# Altium PCB Equipment.PcbDoc
Units mil, origin at the board's own origin, x right, y up, seen from the top; angles counter-clockwise.
Board outline 3543.31 x 4133.86 mil, 2 copper layers (Top Layer, Bottom Layer); 120 components, 103 nets, 464 pads, 349 vias.
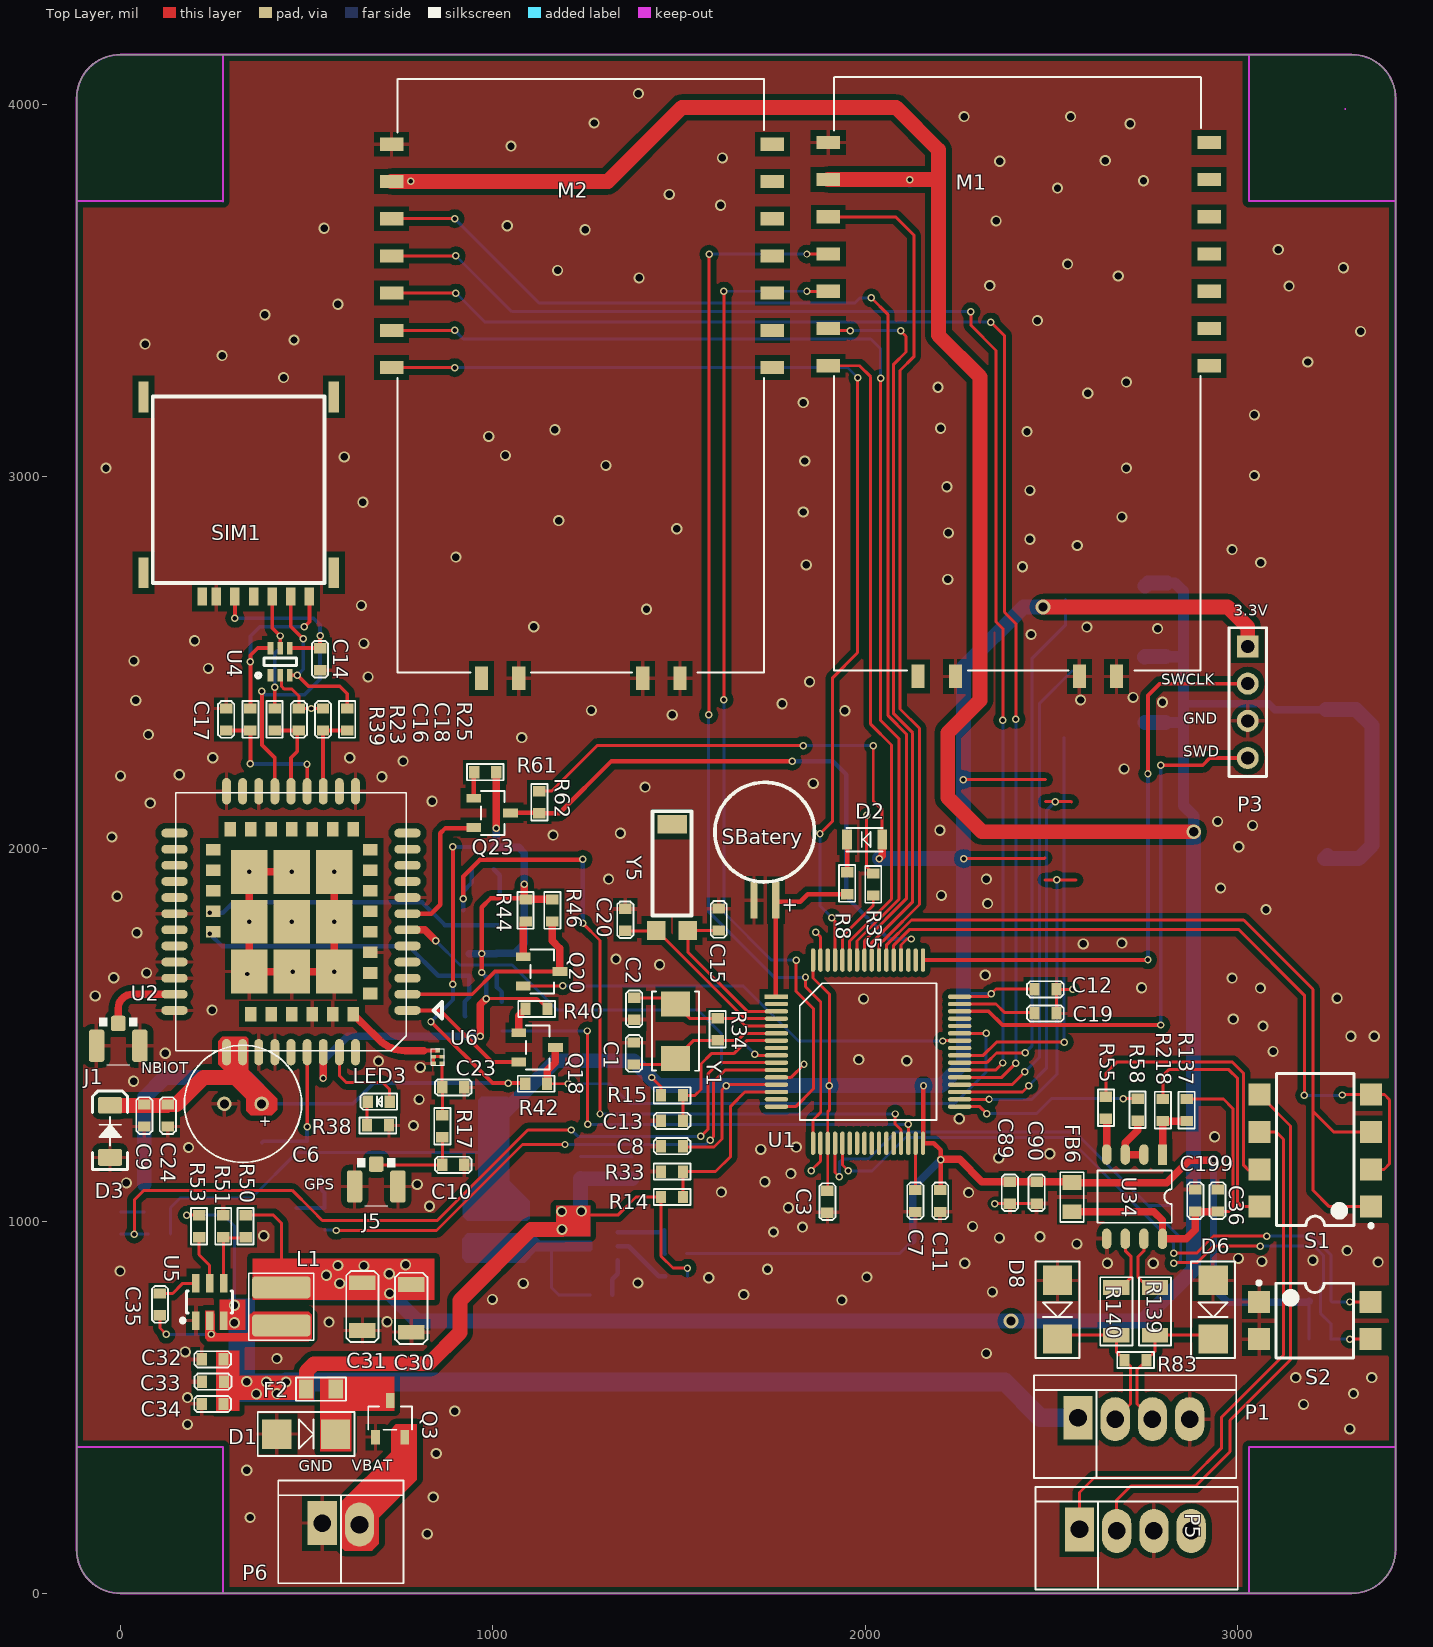
[diagram p0: Top Layer view]
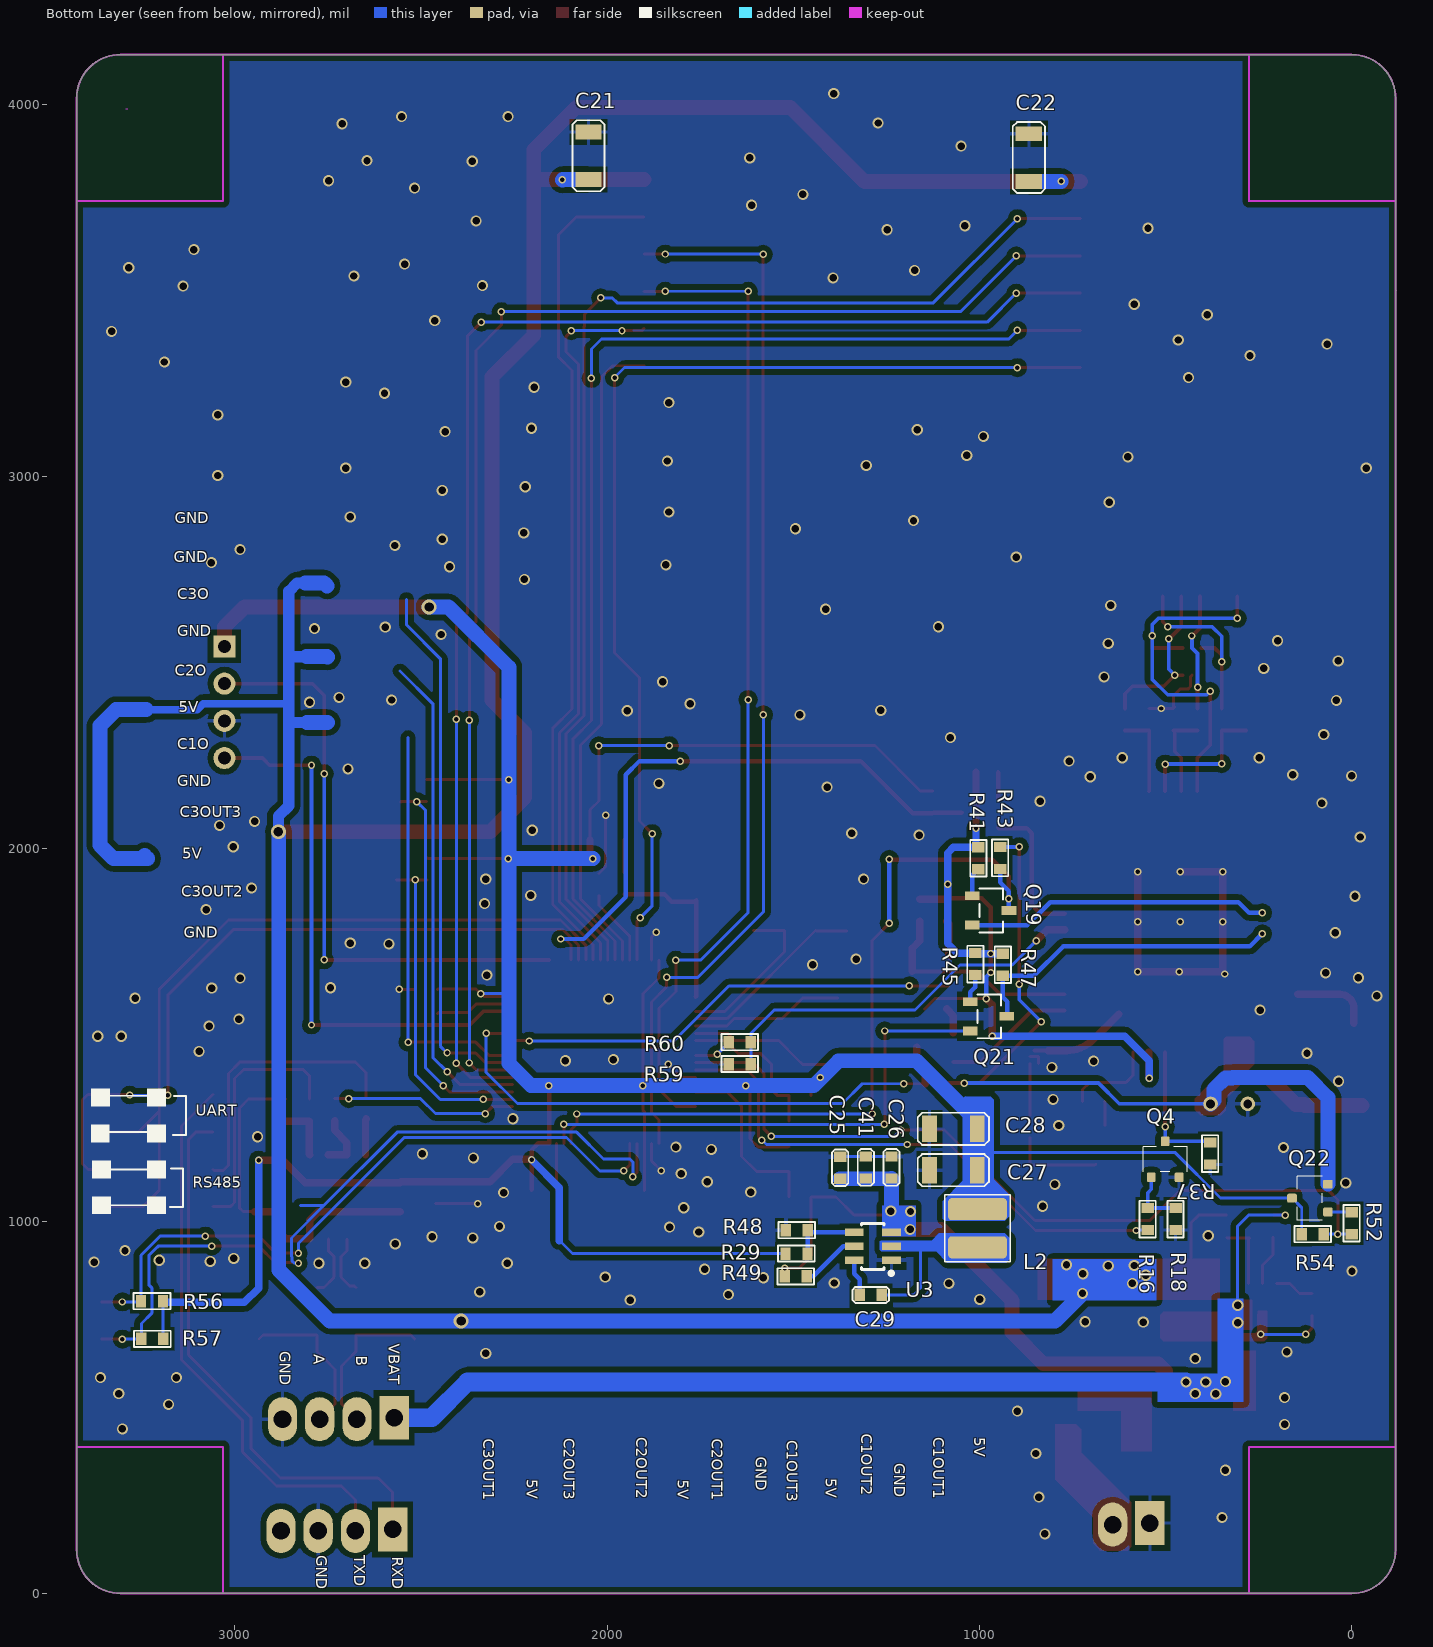
[diagram p1: Bottom Layer view, seen from below]

## Layer stack, top to bottom
Top Layer: signal copper 1.4
Dielectric: dielectric 12.6, FR-4, Dk 4.8
Bottom Layer: signal copper 1.4

## Board outline
-118.11,118.11 ccw(c0,118.11) 0,0 3307.09,0 ccw(c3307.09,118.11) 3425.2,118.11 3425.2,4015.75 ccw(c3307.09,4015.75) 3307.09,4133.86 0,4133.86 ccw(c0,4015.75) -118.11,4015.75

## Design rules (kind name [scope] priority, off if disabled: settings)
Clearance rf [InNetClass('rf')] p1: gap=25
Clearance gnd [InPolygon  And InNet(AGND)] p2: gap=15
Clearance [All] p3: gap=5
DiffPairsRouting [All] p1: maxlimit=10 minlimit=10 mostfreqgap=10 maxuncoupledlength=500
MinimumSolderMaskSliver [All] p1: minsoldermaskwidth=2
PolygonConnect PolygonConnect_1 [IsVia And InNet(AGND)] p1: connectstyle=Direct reliefconductorwidth=10 reliefentries=4 polygonreliefangle="90 Angle"
PolygonConnect [All] p2: connectstyle=Relief reliefconductorwidth=10 reliefentries=4 polygonreliefangle="90 Angle"
RoutingVias [All] p1: holewidth=28 width=50 viastyle="Through Hole" minholewidth=28 minwidth=50 maxholewidth=28 maxwidth=50
SilkscreenOverComponentPads [All] p1: minsilkscreentomaskgap=1
SolderMaskExpansion [All] p1: expansion=4
Width [All] p1: maxlimit=200 minlimit=6 preferedwidth=10
25 further rules are at their usual default settings.

## Classes and differential pairs
component class rs485: C36 C89 C90 C199 D6 D8 FB6 P1 P5 R55 R58 R83 R137 R139 R140 R218 S1 U34
component class POWER: C25 C26 C27 C28 C29 C30 C31 C32 C33 C34 C35 C41 D1 F2 L1 L2 P6 Q3 Q22 R29 R48 R49 R50 R51 R52 R53 R54 U3 U5
component class nbiot&gps: C6 C9 C10 C14 C16 C17 C18 C23 C24 D3 J1 J5 LED3 Q4 Q18 Q19 Q20 Q21 R16 R17 R18 R23 R25 R37 R38 R39 R40 R41 R42 R43 R44 R45 R46 R47 SIM1 U2 U4 U6
component class LORA: C21 C22 M1 M2
component class CPU: C1 C2 C3 C7 C8 C11 C12 C13 C15 C19 C20 D2 P3 Q23 R8 R14 R15 R33 R34 R35 R59 R60 R61 R62 SBatery U1 Y1 Y5
component class CONNECTOR: R56 R57 S2
differential pair 4852: +4852_P -4852_N
differential pair 485: +485_P -485_N

## Components (designator, comment, footprint, x,y, rotation, side; value= is the part's Value field where it differs from the comment)
C1 "22pF" 0603c 1379,1480 r270 top
C2 "22pF" 0603c 1380,1541 r90 top
C3 "0.1uF" 0603c 1899,1023 r90 top
C6 "1000uF/6.3V/8*12" 8*12 328.98,1315.19 r0 top
C7 "2.2uF" 0603c 2135,1025 r90 top
C8 "0.1uF" 0603c 1451.94,1201.5 r0 top
C9 "33pF" 0603C 126.98,1254.19 r90 top
C10 "NC" 0603C 864.32,1151.39 r0 top
C11 "0.1uF" 0603c 2202,1025 r90 top
C12 "0.1uF" 0603c 2514,1623 r180 top
C13 "0.1uF" 0603c 1451.94,1269.75 r0 top
C14 "0.1uF" 0603C 536,2480 r90 top
C15 "10pF" 0603c 1607,1840 r270 top
C16 "10pF/NC" 0603C 478.98,2377.19 r270 top
C17 "10pF/NC" 0603C 283.98,2377.19 r270 top
C18 "10pF/NC" 0603C 543.98,2377.19 r270 top
C19 "2.2uF" 0603c 2514,1558 r180 top
C20 "10pF" 0603c 1356,1839 r270 top
C21 "22uF/10V" 1206C 2050,3798 r90 bottom
C22 "22uF/10V" 1206C 867,3793 r90 bottom
C23 "NC" 0603C 864.32,1359.39 r0 top
C24 "10pF" 0603C 63.98,1254.19 r90 top
C25 "0.1uF/25V" 0603C 1374,1173.06 r270 bottom
C26 "0.1uF/25V" 0603C 1236,1174.06 r270 bottom
C27 "22uF/10V" 1206C 1006,1137 r0 bottom
C28 "22uF/10V" 1206C 1006,1248 r0 bottom
C29 "0.1uF" 0603C 1262,802 r0 bottom
C30 "22uF/10V" 1206C 781,830 r270 top
C31 "22uF/10V" 1206C 649.85,834.47 r270 top
C32 "10uF/25V" 0603C 217.94,629 r0 top
C33 "0.1uF/25V" 0603C 218.94,569 r0 top
C34 "0.1uF/25V" 0603C 217.94,509 r0 top
C35 "0.1uF" 0603C 106,747 r90 top
C36 "10uF/25V" 0603C 2947,1085 r270 top
C41 "10uF/25V" 0603C 1305,1174.06 r270 bottom
C89 "10uF/25V" 0603C 2389,1047 r90 top
C90 "0.01uF" 0603C 2461,1047 r90 top
C199 "0.01uF" 0603C 2887,1085 r270 top
D1 "SMAJ12CA" SMA 420,428 r0 top
D2 "RB751V40T1" SOD323 2046,2025 r180 top
D3 "DIODE_SCHOTTKY_0" LL-34(D1206) -28.02,1241.19 r90 top
D6 "SMAJ6.5CA" SMA 2935,841 r270 top
D8 "SMAJ6.5CA" SMA 2517,841 r270 top
F2 "SMD0805P300" 0805R 578,549 r180 top
FB6 "JWWBW2012 M600HT" 0805CZ 2556,1025 r90 top
J1 "IPEX" RF-UFL -6.02,1471.19 r180 top
J5 "IPEX" RF-UFL 686.98,1093.19 r180 top
L1 "SRP4020TA-3R3M" CD_4*4 432,771 r0 top
L2 "SRP4020TA-3R3M" CD_4*4 1005,981 r180 bottom
LED3 "LED" 0603LED 722.98,1321.19 r180 top
M1 "E22-400T30S" E22-400T30S 1917,2479 r0 top
M2 "E22-400T30S" E22-400T30S 744,2474 r0 top
P1 "Header 4" 4X2.54MMZ 2572,472 r0 top
P3 "Header 4" HDR1X4 3028,2544 r270 top
P5 "Header 4" 4X2.54MMZ 2576,172 r0 top
P6 "Header 2" 2X2.54MMZ 542,189 r0 top
Q3 "Si2369DS" sot23-3 685,420 r270 top
Q4 "S8050" SOT23 500.98,1166.19 r180 bottom
Q18 "MMBT3904" SOT23-3 1069.98,1506.19 r180 top
Q19 "MMBT3904" SOT23-3 1018.98,1874.19 r0 bottom
Q20 "MMBT3904" SOT23-3 1081.98,1710.19 r180 top
Q21 "MMBT3904" SOT23-3 1024.53,1589.69 r0 bottom
Q22 "SI2342DS" SOT23 112,1062 r90 bottom
Q23 "MMBT3904" SOT23-3 949,2136 r180 top
R8 "1K" 0603R 1952,1937 r270 top
R14 "33K/1%" 0603R 1451.94,1065 r0 top
R15 "10K" 0603R 1451.94,1338 r0 top
R16 "4.7K" 0603R 547.98,1035.19 r270 bottom
R17 "0" 0603R 864.32,1284.39 r270 top
R18 "47K" 0603R 472.98,1035.19 r270 bottom
R23 "10R" 0603R 413.98,2318.13 r90 top
R25 "10R" 0603R 608.98,2318.13 r90 top
R29 "33.2K/1%" 0603R 1521,913 r180 bottom
R33 "5.1K/1%" 0603R 1511,1133.25 r180 top
R34 "1MR" 0603R 1604,1545 r270 top
R35 "100K" 0603R 2022,1875 r90 top
R37 "1K" 0603R 379.98,1211.19 r270 bottom
R38 "1K" 0603R 661.98,1257.19 r0 top
R39 "10R" 0603R 348.98,2318.13 r90 top
R40 "4.7K" 0603R 1087.98,1570.19 r0 top
R41 "4.7K" 0603R 1002.98,1945.19 r90 bottom
R42 "10K" 0603R 1145.98,1369.19 r180 top
R43 "10K" 0603R 943.98,1946.19 r90 bottom
R44 "4.7K" 0603R 1087.98,1805.19 r90 top
R45 "4.7K" 0603R 1010.98,1661.19 r90 bottom
R46 "4.7K" 0603R 1159.98,1805.19 r90 top
R47 "4.7K" 0603R 936.98,1659.19 r90 bottom
R48 "10K/1%" 0603R 1520,976 r180 bottom
R49 "10K/1%" 0603R 1523,852 r180 bottom
R50 "54.9K/1%" 0603R 336,1016 r270 top
R51 "10K/1%" 0603R 276,1016 r270 top
R52 "10k" 0603R 0,965 r90 bottom
R53 "10K/1%" 0603R 211,957 r90 top
R54 "10k" 0603R 75,965 r0 bottom
R55 "1K" 0603R 2647,1275 r90 top
R56 "10k" 0603R 3252,785 r180 bottom
R57 "10k" 0603R 3251,684 r180 bottom
R58 "1K" 0603R 2732,1270 r90 top
R59 "4.7K" 0603R 1673,1422 r180 bottom
R60 "4.7K" 0603R 1614,1481 r0 bottom
R61 "4.7K" 0603R 950,2206 r0 top
R62 "4.7K" 0603R 1125,2096 r90 top
R83 "100" 0603R 2697,627 r0 top
R137 "100k" 0603R 2864,1269 r90 top
R139 "10" 1206R 2779,694 r90 top
R140 "10" 1206R 2675,694 r90 top
R218 "1K" 0603R 2800,1269 r90 top
S1 "SW DIP-4" SW_SMT_8 3209,1089 r180 top
S2 "SW DIP-2" SW_SMT_4 3208,733 r0 top
SBatery "SBatery" MS621FE 1731,1862 r270 top
SIM1 "microsim" "Nano SIM" 220,2678 r180 top
U1 "STM32F405RGT6" LQFP-64 1762,1603 r0 top
U2 "SIM7080G" SIM868 770.98,1566.19 r180 top
U3 "TPS562201" SOT-23-6 1236,895 r0 bottom
U4 "SMF05C_1" SC70-6L 428.98,2503.19 r90 top
U5 "TPS562201" SOT-23-6 202,733 r90 top
U6 "SAFFB1G56KB0F0A" SAFFB1G56KB0F0A 852.32,1458.73 r270 top
U34 "THVD1500" so-8 2799,1179 r270 top
Y1 "8MHz" CRAY_5032 1491,1583 r270 top
Y5 "32.768K" 32.768K 1524,1781 r180 top

## Footprints (in the part's own frame and the unit in brackets; to place one, negate y for a bottom-side part, rotate by r counter-clockwise, add the part's x,y. Pads: shape width x height; smd on the part's side, far side on the other; paste and mask are expansions set on the pad)
2X2.54MMZ [mm]
  rect 2x3 hole 1.2: 1(0,0)
  oval 2x3 hole 1.2: 2(2.54,-0.1)
  silkscreen extent -3,-4.1 5.54,2.9
4X2.54MMZ [mm]
  rect 2x3 hole 1.2: 1(0,0)
  oval 2x3 hole 1.2: 2(2.54,-0.1) 3(5.08,-0.1) 4(7.62,-0.1)
  silkscreen extent -3,-4.1 10.79,2.9
8*12 [mm]
  round 1 hole 0.6: 1(1.27,0) 2(-1.27,0)
  silkscreen extent -4,-4 4,4
32.768K [mil]
  rect 50x50 smd: 1(0,0) 2(85,0)
  rect 78.74x50 smd: 3(42.13,-285)
  silkscreen extent -10,-320 95,-40
0603c [mm]
  rect 0.7x0.85 smd: 1(0,0) 2(1.5,0)
  silkscreen extent -0.5,-0.55 2,0.55
0603C [mm]
  rect 0.7x0.85 smd: 1(0,0) 2(1.5,0)
  silkscreen extent -0.5,-0.55 2,0.55
0603LED [mm]
  rect 0.7x0.85 smd: 1(0,0) 2(1.5,0)
  silkscreen extent -0.5,-0.55 2,0.55
0603R [mm]
  rect 0.7x0.85 smd: 1(0,0) 2(1.5,0)
  silkscreen extent -0.5,-0.55 2,0.55
0805CZ [mm]
  rect 1x1.3 smd: 1(0,0) 2(2,0)
  silkscreen extent -0.7,-0.8 2.7,0.8
0805R [mm]
  rect 1x1.3 smd: 1(0,0) 2(2,0)
  silkscreen extent -0.7,-0.8 2.7,0.8
1206C [mm]
  rect 1x1.8 smd: 1(0,0) 2(3.25,0)
  silkscreen extent -0.8,-1.1 4.05,1.1
1206R [mm]
  rect 1x1.8 smd: 1(0,0) 2(3.25,0)
  silkscreen extent -0.7,-1.1 3.95,1.1
CD_4*4 [mm]
  rrect30% 4x1.5 smd: 1(0,-1.3) 2(0,1.3)
  silkscreen extent -2.23,-2.3 2.22,2.28, body extent -2,-2 2,2, height 1
CRAY_5032 [mm]
  rect 1.7x2 smd: 1(0,0) 2(3.7,0)
  silkscreen extent -0.86,-1.6 4.55,1.6
E22-400T30S [mm]
  rect 1.6x0.9 smd: 1(-0.4,20.8) 2(-0.4,23.34) 3(-0.4,25.88) 4(-0.4,28.42) 5(-0.4,30.96) 6(-0.4,33.5) 7(-0.4,36.04) 8(25.578,36.04) 9(25.578,33.5) 10(25.578,30.96) 11(25.578,28.42) 12(25.578,25.88) 13(25.578,23.34) 14(25.578,20.8)
  rect 0.9x1.6 smd: 15(19.27,-0.4) 16(16.73,-0.4) 17(8.27,-0.4) 18(5.73,-0.4)
  silkscreen extent 0,0 25.02,40.5
HDR1X4 [mm] "Connector; Header; 4 Position"
  rect 1.5x1.5 hole 0.9: 1(0,0)
  round 1.5 hole 0.9: 2(2.54,0) 3(5.08,0) 4(7.62,0)
  silkscreen extent -1.27,-1.27 8.89,1.27
LL-34(D1206) [mil]
  rrect25% 45x65 smd: 1(-70,0) 2(70,0)
  silkscreen extent -102,-47 108,47, body extent -70,-28 68,30, height 56
LQFP-64 [mm]
  rect 1.6x0.3 smd: 1(0,0)
  oval 1.6x0.3 smd: 2(0,-0.5) 3(0,-1) 4(0,-1.5) 5(0,-2) 6(0,-2.5) 7(0,-3) 8(0,-3.5) 9(0,-4) 10(0,-4.5) 11(0,-5) 12(0,-5.5) 13(0,-6) 14(0,-6.5) 15(0,-7) 16(0,-7.5) 33(12.5,-7.5) 34(12.5,-7) 35(12.5,-6.5) 36(12.5,-6) 37(12.5,-5.5) 38(12.5,-5) 39(12.5,-4.5) 40(12.5,-4) 41(12.5,-3.5) 42(12.5,-3) 43(12.5,-2.5) 44(12.5,-2) 45(12.5,-1.5) 46(12.5,-1) 47(12.5,-0.5) 48(12.5,0)
  oval 0.3x1.6 smd: 17(2.5,-10) 18(3,-10) 19(3.5,-10) 20(4,-10) 21(4.5,-10) 22(5,-10) 23(5.5,-10) 24(6,-10) 25(6.5,-10) 26(7,-10) 27(7.5,-10) 28(8,-10) 29(8.5,-10) 30(9,-10) 31(9.5,-10) 32(10,-10) 49(10,2.5) 50(9.5,2.5) 51(9,2.5) 52(8.5,2.5) 53(8,2.5) 54(7.5,2.5) 55(7,2.5) 56(6.5,2.5) 57(6,2.5) 58(5.5,2.5) 59(5,2.5) 60(4.5,2.5) 61(4,2.5) 62(3.5,2.5) 63(3,2.5) 64(2.5,2.5)
  silkscreen extent 1.59,-8.41 10.91,0.91
MS621FE [mm]
  rect 2.5x0.5 smd: 1(0,-0.749) 2(0,0.749)
  silkscreen extent -8.05,-3.41 -1.25,3.39
"Nano SIM" [mm]
  rect 0.7x2.1 smd: 0(-8.97,-1.615) 0(-8.97,-13.615) 0(4.02,-1.615) 0(4.02,-13.615)
  rect 0.65x1.23 smd: 1(-2.22,0) 2(-4.76,0) 3(-7.3,0) 5(-0.95,0) 6(-3.49,0) 7(-6.03,0) 8(0,0)
  silkscreen extent -8.33,-13.64 3.38,-0.91
RF-UFL [mm]
  rrect30% 1x1.05 smd: 1(0,-1.525)
  rrect30% 1.05x2.2 smd: 2(-1.475,0) 2(1.475,0)
  silkscreen extent -1.3,-1.93 1.3,1.3, body extent -1.7,-1.55 1.7,1.55, height 1.25
SAFFB1G56KB0F0A [mm]
  rect 0.3x0.3 smd: 1(0,0)
  rect 0.25x0.35 smd: 2(0.425,-0.288) 5(0.425,0.288)
  rect 0.3x0.35 smd: 3(0.9,-0.288) 4(0.9,0.288)
  silkscreen extent -0.1,-0.44 1,0.46
SC70-6L [mm]
  rect 0.85x0.4 smd: 1(-0.925,0.65) 2(-0.925,0) 3(-0.925,-0.65) 4(0.925,-0.65) 5(0.925,0) 6(0.925,0.65)
  silkscreen extent -1.09,-1.1 0.25,1.65
SIM868 [mm]
  oval 1.8x0.6 smd: 1(0,0) 2(0,-1.1) 3(0,-2.2) 4(0,-3.3) 5(0,-4.4) 6(0,-5.5) 7(0,-6.6) 8(0,-7.7) 9(0,-8.8) 10(0,-9.9) 11(0,-11) 12(0,-12.1) 22(15.9,-12.1) 23(15.9,-11) 24(15.9,-9.9) 25(15.9,-8.8) 26(15.9,-7.7) 27(15.9,-6.6) 28(15.9,-5.5) 29(15.9,-4.4) 30(15.9,-3.3) 31(15.9,-2.2) 32(15.9,-1.1) 33(15.9,0)
  oval 0.6x1.8 smd: 13(3.55,-14.95) 14(4.65,-14.95) 15(5.75,-14.95) 16(6.85,-14.95) 17(7.95,-14.95) 18(9.05,-14.95) 19(10.15,-14.95) 20(11.25,-14.95) 21(12.35,-14.95) 34(12.35,2.85) 35(11.25,2.85) 36(10.15,2.85) 37(9.05,2.85) 38(7.95,2.85) 39(6.85,2.85) 40(5.75,2.85) 41(4.65,2.85) 42(3.55,2.85)
  rect 1x0.8 smd: 43(2.549,-1.159) 44(2.549,-2.559) 45(2.549,-3.959) 46(2.549,-5.359) 47(2.549,-6.759) 48(2.549,-8.159) 49(2.549,-9.559) 50(2.549,-10.959) 58(13.251,-10.959) 59(13.251,-9.559) 60(13.251,-8.159) 61(13.251,-6.759) 62(13.251,-5.359)
  rect 0.8x1 smd: 51(3.7,-12.359) 52(5.1,-12.359) 53(6.5,-12.359) 54(7.9,-12.359) 55(9.3,-12.359) 56(10.7,-12.359) 57(12.1,-12.359) 63(10.7,0.25) 64(9.3,0.25) 65(7.9,0.25) 66(6.5,0.25) 67(5.1,0.25) 68(3.7,0.25)
  rect 2.5x3 smd: 69(5,-2.65) 70(5,-6.05) 71(5,-9.45) 72(7.9,-9.45) 73(10.8,-9.45) 74(10.8,-6.05) 75(10.8,-2.65) 76(7.9,-2.65) 77(7.9,-6.05)
  silkscreen extent -2.35,-14.85 15.8,2.75
SMA [mm]
  rect 2x2 smd: 1(0,0) 2(4,0)
  silkscreen extent -1.3,-1.5 5.3,1.5
so-8 [mil]
  rect 55x25 smd: 1(0,0)
  oval 55x25 smd: 2(0,-50) 3(0,-100) 4(0,-150) 5(226.38,-150) 6(226.38,-100) 7(226.38,-50) 8(226.38,0)
  silkscreen extent 43,-175 183,25
SOD323 [mm]
  rect 0.65x1.35 smd: 1(0,0) 2(2.4,0)
  silkscreen extent -0.03,-0.8 2.44,0.8
SOT23 [mm]
  rrect30% 0.6x0.65 smd: 1(-0.95,-1.225) 2(0.95,-1.225) 3(0,1.225)
  silkscreen extent -1.5,-0.85 1.5,0.85, body extent -1.45,-1.4 1.45,1.4, height 1.2
sot23-3 [mm]
  rect 1x0.6 smd: 1(0,0) 2(0,2) 3(-2.5,1)
  silkscreen extent -2.1,-0.5 -0.5,2.5
SOT23-3 [mm]
  rect 1x0.6 smd: 1(0,0) 2(0,2) 3(-2.5,1)
  silkscreen extent -2.1,-0.5 -0.5,2.5
SOT-23-6 [mil]
  rect 50x20 smd: 1(0,0) 2(0,-37.4) 3(0,-74.8) 4(100,-74.8) 5(100,-37.4) 6(100,0)
  silkscreen extent 0,-99 80,35
SW_SMT_4 [mm] "DIP; 4 Leads; Row Spacing 7.62 mm; Pitch 2.54 mm"
  rect 1.5x1.5 smd: 1(-3.81,1.27) 2(-3.81,-1.27) 3(3.81,-1.27) 4(3.81,1.27)
  silkscreen extent -3.93,-2.55 2.65,2.69
SW_SMT_8 [mm] "DIP; 4 Leads; Row Spacing 7.62 mm; Pitch 2.54 mm"
  rect 1.5x1.5 smd: 1(-3.81,1.27) 2(-3.81,-1.27) 3(-3.81,-3.835) 4(-3.81,-6.375) 5(3.81,-6.375) 6(3.81,-3.81) 7(3.81,-1.27) 8(3.81,1.27)
  silkscreen extent -3.94,-7.82 2.65,2.69

## Part data
C1 C2 C3 C7 C8 C9 C11 C12 C13 C14 C15 C16 C17 C18 C19 C20 C21 C22 C24 C25 C26 C27 C28 C29 C30 C31 C32 C33 C34 C35 C41: library part CAP, "Capacitor"
C6: library part "Cap Pol3", "Polarized Capacitor (Surface Mount)"
C10 C23: library part Cap, "Capacitor"
C36 C89 C90 C199: library part C, "C"
D1: library part DIODE_SCHOTTKY_0
D2: library part Diode, "Default Diode"
D6 D8: library part "DIODE S", "Schottky Diode"
F2: library part "Fuse 2", "Fuse"
FB6: library part FB
J1 J5: library part ANT
L1 L2: library part INDUCTOR_1
P1 P3 P5: "Header, 4-Pin"
P6: "Header, 2-Pin"
Q3: library part NCE4060K, "NMOSFET"
Q4: library part 2N1069_1
Q18 Q19 Q20 Q21 Q23: library part NPN
Q22: library part "MOSFET P_1"
R8 R17: library part Res2, "Resistor"
R14 R15 R33 R34 R35: library part Res3, "Resistor"
R16 R18 R23 R25 R29 R37 R38 R39 R40 R41 R42 R43 R44 R45 R46 R47 R48 R49 R50 R51 R52 R53 R54 R56 R57 R59 R60 R61 R62: library part RES1
R55 R58 R83 R218: library part R, "R"
R137 R139 R140: library part RES2
S1: "DIP Switch, 4 Position, SPST"
S2: "DIP Switch, 2 Position, SPST"
U1: "ARM Cortex-M4 32-bit MCU+FPU, 210 DMIPS, 1024 kB Flash, 192 kB Internal RAM, 51 I/Os, 64-pin LQFP, -40 to 85 degC, Tray"
U2: library part SIM868E/SIM868
U4: "TVS"
U6: library part SAFFB1G56KBOFA
U34: library part SN65HVD06D
Y1 Y5: library part XTAL, "Crystal Oscillator"

## Via types
v1: diameter 30, hole 20, Top Layer to Bottom Layer, tented both sides, 216 vias
v2: diameter 20, hole 12, Top Layer to Bottom Layer, tented both sides, 130 vias
v3: diameter 40, hole 25, Top Layer to Bottom Layer, tented both sides, 3 vias

## Nets (pads, with @x,y where several pads share a name; then routed paths per layer and width w, separated by ;. In a path a pad name is that pad's centre, name@x,y a point inside that pad or via, vN(x,y) a via of type N, cw(c..) or ccw(c..) an arc to the next point about the centre after c; other vN are vias at no path point)
485_3.3V1: C36.2 C199.2 FB6.1 R137.2 U34.8 | length 955.5
  Top Layer w8: R137.2 2962.94,1328.06 2988,1303 2988,1036 2977.94,1025.94 C36.2
  Top Layer w20: FB6.1 2776,1025 2799,1002 U34.8 2862.62,952.62 2887,977 C199.2 C36.2
485_EN1: R58.2 U1.33 | length 502.2
  Top Layer w8: U1.33 2308.28,1307.72 v2(2327,1289) ; v2(2694,1329) v2(2694,1329) R58.2
  Bottom Layer w8: v2(2327,1289) 2461,1289 2501,1329 v2(2694,1329)
485_N: D6.2 P1.3 R83.2 R139.1 | length 446.3
  Top Layer w8: 2731,586.17 2731,563 ; P1.3 2731,509.06 2731,563 ; D6.2 2924.52,694 R139.1 2779,649.94 R83.2 2731,601.94 2731,563
485_P: D8.2 P1.2 R83.1 R140.1 | length 434.2
  Top Layer w8: D8.2 2527.48,694 R140.1 2675,649 R83.1 2713,611 2713,573 ; P1.2 2713,509.06 2713,573 ; 2713,586.17 2713,573
4852_N: R140.2 U34.6 | length 161.2
  Top Layer w8: R140.2 2679.09,826.05 2691.53,826.05 2715,849.51 2715,904.53 2699,920.53 U34.6
4852_P: R139.2 U34.7 | length 167.2
  Top Layer w8: U34.7 2749,920.53 2733,904.53 2733,849.51 2760.56,821.95 R139.2
AGND: C1.1 C2.1 C3.1 C6.2 C7.1 C8.1 C9.1 C10.2 C11.1 C12.1 C13.1 C14.1 C15.1 C16.1 C17.1 C18.1 C19.1 C20.1 C21.2 C22.2 C23.2 C24.1 C25.1 C26.1 C27.2 C28.2 C30.2 C31.2 C32.1 C33.1 C34.1 C36.1 C41.1 C89.1 C90.1 C199.1 D1.1 D3.1 D6.1 D8.1 J1.2 J5.2 M1.7 M1.15 M1.16 M1.17 M2.7 M2.15 M2.16 M2.17 P1.4 P3.3 P5.3 P6.1 Q3.1 Q4.2 R18.2 R33.2 R35.2 R37.2 R38.2 R48.1 R51.1 R59.1 S2.1 S2.2 SBatery.1 SIM1.5 U1.12 U1.18 U1.63 U2.8 U2.13 U2.19 U2.21 U2.27 U2.30 U2.31 U2.33 U2.36 U2.37 U2.45 U2.66 U2.67 U2.69 U2.70 U2.71 U2.72 U2.73 U2.74 U2.75 U2.76 U2.77 U3.1 U4.2 U5.1 U6.2 U6.3 U6.5 U34.5 | length 1888.9
  Top Layer w8: U4.2 433,2462.75 433,2436 440,2429 461,2429 478.98,2411.02 C16.1 ; C16.1@475,2381.16 C16.1 ; C18.1 v2(512,2377.19) C16.1 ; U6.3 U6.2 U6.5 ; U1.12 1801.46,1386.46 v2(1836,1421) ; v2(1855,1136) 1880.11,1161.11 U1.18 ; v2(1868,1776) 1880.11,1763.89 U1.63 ; v2(2004,2091) 2004,1952.06 R35.2 ; v2(2348,1047) C89.1 C90.1 ; C19.1 C12.1 v2(2558,1623)
  Top Layer w20: v2(459.95,1938.24) v2(345.78,1938.24) v2(345.78,1804.38) U2.75 v2(574.13,1670.52) v2(574.13,1804.38) v2(574.13,1938.24)
  Bottom Layer w8: C26.1 C41.1 1373,1174.06 C25.1
  other v1: 824,160 348,204 840,259 339,331 848,376 3302,442 180,454 898,490 3178,508 180,526 3312,537 3157,580 3361,580 420,631 2326,645 174,649 560,729 716,730 1938,788 999,790 1674,803 2342,810 1082,833 1390,834 1580,848 2005,850 -1,866 1738,871 2268,887 2651,887 2774,887 3378,890 3066,892 3203,895 3003,900 3295,921 2569,939 2361,955 2470,958 385,961 1754,971 1832,984 2289,986 1794,1036 830,1040 2278,1077 1614,1078 797,1099 16,1103 1731,1106 1801,1128 2359,1170 2496,1181 1720,1193 183,1198 1815,1199 2939,1227 787,1257 2253,1275 802,1327 35,1376 805,1413 693,1430 2112,1431 1983,1434 120,1451 3096,1456 3305,1497 3368,1497 3069,1524 2989,1543 246,1567 1996,1597 3268,1599 -68,1605 3062,1626 2743,1627 2986,1653 -18,1654 2323,1661 70,1667 1448,1689 1331,1704 2586,1745 2690,1747 44,1775 3077,1837 2329,1853 -9,1873 2205,1875 2955,1895 1311,1919 2326,1919 3004,2006 -23,2032 1162,2037 1343,2042 2201,2050 3041,2063 2947,2074 80,2123 837,2128 1409,2166 1861,2176 702,2194 0,2196 158,2199 2696,2215 759,2236 248,2245 616,2245 1078,2299 75,2307 1482,2360 1946,2371 1265,2372 1777,2390 2799,2394 41,2399 2579,2400 2720,2407 1851,2449 665,2462 236,2485 36,2505 654,2552 199,2559 2446,2576 2786,2592 2596,2596 1110,2597 1413,2644 647,2654 2222,2724 2423,2758 1842,2763 3063,2769 901,2784 2986,2804 2570,2815 2443,2832 2224,2849 1494,2860 1177,2882 2690,2892 1834,2905 651,2931 2443,2963 2220,2973 3046,3003 -39,3023 2702,3023 1304,3030 1838,3042 601,3053 1034,3057 989,3108 2435,3121 1167,3126 2203,3130 3046,3166 1834,3199 2598,3224 2196,3240 2702,3254 438,3266 3189,3308 273,3325 66,3356 466,3367 3331,3390 2463,3419 388,3435 584,3463 3139,3512 2335,3513 1393,3534 2680,3539 1174,3554 3285,3561 2544,3571 3110,3610 1248,3663 547,3667 1039,3674 2352,3687 1612,3729 1474,3758 2517,3775 2748,3795 2362,3847 2645,3849 1617,3856 1049,3888 2712,3948 1272,3950 2266,3967 2552,3967 1391,4029
  other v2: 341,1664 463,1670.52 459.95,1804.38
CTRL1+: U1.40 | length 1113.1
  Top Layer w8: U1.40 2317.52,1445.52 2353,1481 v2(2534.54,1481)
  Bottom Layer w8: v2(2534.54,1481) 2534.54,2299
CTRL1OUT11: U1.15
CTRL1OUT21: U1.23
CTRL1OUT31: U1.24
CTRL2+: U1.36 | length 1318.7
  Top Layer w8: U1.36 2394.78,1366.78 v2(2429.55,1401.55)
  Bottom Layer w8: v2(2429.55,1401.55) 2468,1440 2468,2390 2556,2478
CTRL2OUT11: U1.25
CTRL2OUT21: U1.26
CTRL2OUT31: U1.27
CTRL3+: U1.39 | length 1449.9
  Top Layer w8: U1.39 2326.83,1425.83 2353,1452 v2(2430,1452)
  Bottom Layer w8: v2(2430,1452) 2448,1470 2448,2511 2539,2602 2539,2670
CTRL3OUT11: U1.28
CTRL3OUT21: U1.34 | length 894.1
  Top Layer w8: U1.34 v2@2332.59,1327.41 ; 2483.68,1917 v2(2515,1917) 2565.57,1917 2566.26,1916.32
  Bottom Layer w8: v2(2333,1327) 2448,1327 2515,1394 v2(2515,1917)
CTRL3OUT31: U1.35 | length 1055.1
  Top Layer w8: U1.35 2423.09,1347.09 v2(2440.26,1364.26) ; 2484.68,2127 2553.63,2127 2554.26,2126.37
  Bottom Layer w8: v2(2440.26,1364.26) 2488,1412 2488,2104 v2(2511,2127)
DTR: R59.2 R60.1 U2.6 | length 1082.5
  Top Layer w20: U2.6 817.28,1782.73 v2(847,1753)
  Bottom Layer w8: v2(847,1753) 912,1688 1052,1688 1173,1567 1385,1567 1551,1567 1614,1504 1614,1439 ; R59.2 1614,1422.06 R60.1
EN_3.3V: R52.1 R54.1 U1.10 | length 2213.2
  Top Layer w8: v2(37,965) 37,1057 63,1083 461.19,1083 513.09,1031.09 542.19,1002 851,1002 1094,1245 v2(1211,1245) ; v2(1559,1228) 1578,1247 1578,1396 1607.83,1425.83 U1.10
  Bottom Layer w8: R52.1 v2(37,965) R54.1 ; v2(1211,1245) 1228,1228 v2(1559,1228)
GPS_RXD: Q21.3 R47.1 U2.62 | length 858
  Bottom Layer w12: v2(240,1772) 274,1738 775,1738 853.81,1659.19 R47.1 936.98,1601.98 925,1590 925,1551.42 Q21.3
GPS_RXD3: Q19.3 R43.1 U1.29 | length 2102.8
  Top Layer w8: v2(1242,1800) 1288,1754 v2(1288,1288) ; v2(2081,1288) 2081,1261 2096.65,1245.35 U1.29
  Top Layer w12: v2(920.55,1866) 920.55,1925.92 965.63,1971 1241,1971 v2(1242,1972)
  Bottom Layer w8: v2(1288,1288) v2(2081,1288)
  Bottom Layer w12: Q19.3 v2(920.55,1866) 920.55,1886.55 943.98,1909.98 R43.1 ; v2(1242,1800) v2(1242,1972)
GPS_TXD: Q19.2 U2.61 | length 816.5
  Bottom Layer w12: v2(240,1828) 275,1828 304,1857 810,1857 871.55,1795.45 Q19.2
GPS_TXD3: Q21.2 U1.30 | length 1392.7
  Top Layer w8: v2(1253.95,1510.95) 1253.95,1261.05 v2(1255,1260) ; v2(2116,1260) 2116.33,1259.67 U1.30
  Bottom Layer w8: Q21.2 v2(1253.95,1510.95) v2@1254,1511 ; v2(1255,1260) v2(2116,1260)
LORA_AUX: M1.5 U1.55 | length 2289.9
  Top Layer w8: M1.5 2082,3697.9 2131,3648.9 2131,3322 2094,3285 2094,2376 2146,2324 2146,1851 2058,1763 ; U1.55 2037.59,1742.59 2058,1763 ; 2050.5,1755.5 2058,1763
LORA_AUX2: M2.5 U1.57 | length 3251.9
  Top Layer w8: M2.5 v2(897.9,3692.9) ; U1.57 1998.22,1753.22 2111,1866 2111,2309 2062,2358 2062,3403 2061,3404 2061,3436 v2(2017,3480)
  Bottom Layer w8: v2(897.9,3692.9) 1123.8,3467 1973,3467 1986,3480 v2(2017,3480)
LORA_M0: M1.1 U1.59 | length 1762.4
  Top Layer w8: M1.1 1985.1,3297.9 2015,3268 2015,2335 2071,2279 2071,1865 1958.85,1752.85 U1.59
LORA_M1: M1.2 U1.56 | length 1973.6
  Top Layer w8: M1.2 1907.15,3392 v2(1960,3392) ; U1.56 2017.91,1747.91 2128,1858 2128,2312 2077,2363 2077,3302 2109.95,3334.95 2109.95,3377.05 v2@2095.5,3391.5
  Bottom Layer w8: v2(1960,3392) v2(2096,3392)
LORA_M02: M2.1 U1.61 | length 2886.2
  Top Layer w8: M2.1 v2(897.9,3292.9) v2@898,3293 ; v2(1879,2041) 1913,2075 1913,2460 1980,2527 v2(1980,3266) ; v2(1911.11,1814.89) 1919.48,1806.52 U1.61
  Bottom Layer w8: v2(897.9,3292.9) 1953.1,3292.9 v2(1980,3266) ; v2(1879,2041) 1879,1847 v2(1911.11,1814.89)
LORA_M12: M2.2 U1.58 | length 3043
  Top Layer w8: M2.2 v2(897.9,3392.9) v2@898,3393 ; U1.58 1978.54,1752.54 2091,1865 2091,2296 2042,2345 v2(2042,3264)
  Bottom Layer w8: v2(897.9,3392.9) 920.8,3370 2015,3370 2042,3343 v2(2042,3264)
LORA_RXD: M1.3 U1.16 | length 2679.9
  Top Layer w8: v2(1621,2401) v2(1621,3498) ; U1.16 1813.72,1307.72 1861,1355 1861,1571 1815,1617 v2(1815,1701) ; v2(1844,3498) 1844.1,3497.9 M1.3
  Bottom Layer w8: v2(1621,2401) 1621,1829 1749,1701 v2(1815,1701) ; v2(1621,3498) v2(1844,3498)
LORA_RXD2: M2.3 U1.37 | length 3827.1
  Top Layer w8: M2.3 v2@900.9,3492.9 ; U1.37 2367.46,1386.46 v2(2405,1424) ; v2(2338,3415) 2374.53,3378.47 2374.53,2636 2405,2605.53 v2(2405,2348)
  Bottom Layer w8: v2(901,3493) 979,3415 v2(2338,3415) ; v2(2405,1424) v2(2405,2348)
LORA_TXD: M1.4 U1.17 | length 2891.2
  Top Layer w8: v2(1580,2360) 1581,2361 v2(1581,3597) ; v2(1840,1655) 1840,1630 1881,1589 1881,1492.55 1881,1292.57 1860.43,1272 U1.17 ; v2(1844,3598) 1844.1,3597.9 M1.4
  Bottom Layer w8: v2(1580,2360) 1580,1831 1756,1655 v2(1840,1655) ; v2(1581,3597) 1582,3598 v2(1844,3598)
LORA_TXD2: M2.4 U1.38 | length 3800.7
  Top Layer w8: M2.4 v2@900.9,3592.9 ; U1.38 2351.15,1406.15 v2(2370,1425) ; v2(2284,3443) 2284,3407 2352,3339 2352,2610 2370,2592 v2(2370,2346) v2@2374,2350
  Bottom Layer w8: v2(901,3593) 1051,3443 v2(2284,3443) ; v2(2370,1425) v2(2370,2346)
MODE1: R57.1 S2.3 U1.20 | length 2151.9
  Top Layer w8: U1.20 1919.48,1130.52 v2(1931,1119) ; v2(2829,887) 2831.37,889.37 2892.37,889.37 2936,933 v2(3062,933) ; v2(3302,683) S2.3
  Bottom Layer w8: v2(1931,1119) 1931,1158.83 1939.17,1167 2009.59,1167 2081.59,1239 2174,1239 ; 2200,1239 2174,1239 ; 2824,1042 2760.81,1042 ; v2(2829,887) 2840,887 2847,894 2847,904.13 2848,905.13 2848,954.81 2760.81,1042 ; v2(3062,933) 3206,933 3215.26,923.74 3231,908 3231,829 3223,821 3223,753 3251,725 R57.1 3252,683 v2(3302,683) ; 2174,1239 2563.81,1239 2760.81,1042
MODE2: R56.1 S2.4 U1.21 | length 1830.4
  Top Layer w8: U1.21 1939.17,1150.83 v2(1955,1135) ; v2(2829,914) 2890,914 2936,960 v2(3079,960) ; v2(3302,783) S2.4
  Bottom Layer w8: v2(1955,1135) 2018.96,1135 2108.96,1225 2545,1225 2829,941 v2(2829,914) ; v2(3079,960) 3200.32,960 3252,908.32 R56.1 3254,783 v2(3302,783)
NBIOT_RXD1: Q18.3 R42.1 U1.43 | length 1519.1
  Top Layer w8: R42.1 v2(1202.81,1369.19) v2@1203,1369 ; U1.43 2324.57,1504.57 v2(2325,1505)
  Top Layer w20: R42.1 1145.98,1404.98 1168.4,1427.4 Q18.3
  Bottom Layer w8: v2(1202.81,1369.19) 1314.81,1369.19 1368,1316 2241,1316 2325,1400 v2(2325,1505)
NBIOT_TXD1: Q20.2 U1.42 | length 1234.1
  Top Layer w8: Q20.2 1187.45,1631.45 v2(1188,1632) ; v2(2209,1484) 2209.89,1484.89 U1.42
  Bottom Layer w8: v2(1188,1632) 1673,1632 1821,1484 v2(2209,1484)
NET_LIGHT: LED3.1 U2.41 | length 246.2
  Top Layer w8: U2.41 587.91,1391.09 607,1372 705,1372 722.98,1354.02 LED3.1
NetC1_2: C1.2 R34.2 U1.6 Y1.2 | length 417.6
  Top Layer w8: C1.2 1474.61,1420.94 Y1.2 1539.61,1485.94 R34.2 1657.94,1485.94 1676.57,1504.57 U1.6
NetC2_2: C2.2 R34.1 U1.5 Y1.1 | length 413.4
  Top Layer w8: C2.2 1473.94,1600.06 Y1.1 1529,1545 R34.1 1658,1545 1678.74,1524.26 U1.5
NetC7_2: C7.2 U1.31 | length 125.7
  Top Layer w8: C7.2 2136.02,1085.07 U1.31
NetC10_1: C10.1 J5.1 R17.2 | length 252.1
  Top Layer w8: J5.1 688.82,1151.39 C10.1 R17.2
NetC15_2: C15.2 U1.3 Y5.1 | length 445
  Top Layer w8: C15.2 1606.94,1781 Y5.1 1524,1723 1683.37,1563.63 U1.3
NetC19_2: C19.2 U1.47 | length 211.3
  Top Layer w8: U1.47 2351.68,1583.32 2375,1560 2452.94,1560 C19.2
NetC20_2: C20.2 U1.4 Y5.2 | length 504.6
  Top Layer w8: C20.2 1437.94,1779.94 Y5.2 1440.38,1781 1677.44,1543.94 U1.4
NetC23_1: C23.1 R17.1 U6.4 | length 139.2
  Top Layer w8: U6.4 863.64,1360.07 C23.1 R17.1
NetC29_1: C29.1 L2.1 U3.2 | length 219.9
  Bottom Layer w8: 1158,929 1158,821 1177,802 C29.1
NetC29_2: C29.2 U3.6 | length 99.2
  Bottom Layer w12: C29.2 C29.2 1321,844 1336,859 U3.6
NetC35_1: C35.1 L1.1 U5.2 | length 183.3
  Top Layer w8: C35.1 106,713 v2(123,696) ; v2(244,696) v2@247,699
  Bottom Layer w8: v2(123,696) v2(244,696)
NetC35_2: C35.2 U5.6 | length 107.2
  Top Layer w8: C35.2 140.06,806.06 167,833 U5.6
NetD1_2: D1.2 F2.1 Q3.3
NetD2_2: D2.2 R8.1 | length 88.2
  Top Layer w12: D2.2 1952,2024.51 R8.1
NetJ1_1: J1.1 U2.32 | length 213.2
  Top Layer w20: J1.1 -6.02,1571.98 cw(c31.5,1572) 31.5,1609.5 U2.32
NetLED3_2: LED3.2 R38.1 | length 64.8
  Top Layer w8: R38.1 661.98,1319.24 LED3.2
NetP5_1: P5.1 S1.6 | length 1501.3
  Top Layer w8: P5.1 2576,271 2615,310 2877,310 2957,390 2957,473 3124,640 3124,1220 3105,1239 S1.6
NetP5_2: P5.2 S1.5 | length 1502.1
  Top Layer w8: P5.2 2676,251 2714,289 2888,289 2980,381 2980,465 3143,628 3143,1256 S1.5
NetQ4_1: Q4.1 R16.1 R18.1 | length 161.7
  Bottom Layer w10: R18.1 R16.1 547.98,1076.02 538.38,1085.62 Q4.1
NetQ18_1: Q18.1 R40.1 | length 71.5
  Top Layer w20: Q18.1 1069.98,1552.19 R40.1
NetQ19_1: Q19.1 R41.1 | length 77.6
  Bottom Layer w12: R41.1 1018.98,1929.19 Q19.1
NetQ20_1: Q20.1 R44.1 | length 97.5
  Top Layer w20: Q20.1 1081.98,1799.19 R44.1
NetQ21_1: Q21.1 R45.1 | length 77.1
  Bottom Layer w12: R45.1 1010.98,1629.02 1024.53,1615.47 Q21.1
NetQ22_1: Q22.1 R52.2 | length 64
  Bottom Layer w8: R52.2 0.54,1024.6 Q22.1
NetQ23_1: Q23.1 R61.1 | length 70.4
  Top Layer w12: Q23.1 949,2205 R61.1
NetQ23_3: Q23.3 R62.1 U1.52 | length 1599.3
  Top Layer w8: U1.52 2096.65,1741.65 2113,1758 v2(2124,1758)
  Top Layer w12: Q23.3 1124.37,2096.63 R62.1 1178.95,2096 1318.95,2236 v2(1804,2236)
  Bottom Layer w12: v2(1804,2236) 1913,2236 1950,2199 1950,1871 2063,1758 v2(2124,1758)
NetR8_2: R8.2 SBatery.2 U1.1 | length 461
  Top Layer w12: U1.1 1760.5,1604.5 SBatery.2 1764.5,1858 1826,1858 1845.94,1877.94 R8.2
NetR14_2: R14.2 R33.1 U1.14 | length 486.9
  Top Layer w8: R14.2 R33.1 1598.25,1133.25 1639,1174 1639,1309 1677.09,1347.09 U1.14
NetR23_2: R23.2 SIM1.2 U4.5 | length 348.4
  Top Layer w10: SIM1.2 407.4,2593.6 v2(429,2572) U4.5@429,2539.63 ; R23.2 v2@413.98,2434
  Bottom Layer w10: v2(414,2434) 414,2524.63 428.98,2539.61 v2@428.98,2571.98
NetR25_2: R25.2 SIM1.7 U4.3 | length 446.5
  Top Layer w10: U4.3 v2(475.23,2466.77) 505,2437 589,2437 608.98,2417.02 R25.2 ; SIM1.7 457.4,2597.6 v2(491,2564)
  Bottom Layer w10: v2(475.23,2466.77) 491,2482.54 v2(491,2564)
NetR29_2: R29.2 R48.2 U3.4 | length 190.9
  Bottom Layer w12: U3.4 1454.75,969.8 R48.2 1460.94,914 R29.2
NetR35_1: R35.1 U1.60 | length 207.9
  Top Layer w8: U1.60 1939.17,1762 1939.17,1765.17 2022,1848 R35.1
NetR39_2: R39.2 SIM1.3 U4.6 | length 516.7
  Top Layer w10: R39.2 348.98,2519.98 368.61,2539.61 U4.6 ; v2(494,2597) 507.4,2610.4 SIM1.3
  Bottom Layer w10: v2@348.98,2502 348.98,2570.98 375,2597 v2(494,2597)
  other v2: 348.98,2503
NetR49_2: R49.2 U3.5 | length 161.2
  Bottom Layer w12: U3.5 1365.6,932.4 1446,852 R49.2
NetR50_2: R50.2 R51.2 U5.4 | length 184.5
  Top Layer w8: U5.4 276.8,952.14 274,954.94 334,954.94 R50.2@335,955.94
NetR53_1: R53.1 U5.5 | length 135.8
  Top Layer w8: R53.1 211,910 239.4,881.6 U5.5
NetR55_1: R55.1 U34.4 | length 96.8
  Top Layer w20: R55.1 2649,1273 U34.4
NetR55_2: R55.2 S1.7 | length 754.4
  Top Layer w8: R55.2 2647,1398 2676,1427 2987,1427 3017,1397 3017,1150 3031,1136 3056,1136 S1.7
NetR58_1: R58.1 U34.2 U34.3 | length 154.7
  Top Layer w20: R58.1 2732,1244 2699,1211 U34.3 U34.2
NetR60_2: R60.2 U1.9 | length 104.7
  Top Layer w8: v2(1704.15,1448.15) 1706.78,1445.52 U1.9
  Bottom Layer w8: R60.2 1673.06,1479.24 v2(1704.15,1448.15)
NetR137_1: R137.1 R218.1 U34.1 | length 154.4
  Top Layer w20: U34.1 2800,1180 R218.1 R137.1
NetR218_2: R218.2 S1.8 | length 676.1
  Top Layer w8: R218.2 2800,1391 2816,1407 2977,1407 3001,1383 3001,1050 3012,1039 S1.8
NetU2_68: U2.68 U6.1 | length 263.6
  Top Layer w10: 815,1458 cw(c816.77,1456.23) 816.77,1458.73 U6.1
  Top Layer w20: U2.68 675.65,1506 676,1506 694.71,1487.29 ccw(c765.42,1558) 765.42,1458 815,1458
PWRKEY: Q4.3 R37.1 U2.39 | length 362.4
  Top Layer w10: v2@501,1253 v2(501.29,1253.29) U2.39
  Bottom Layer w10: R37.1 383.2,1214.42 Q4.3 500.98,1252.98 v2(501.29,1253.29)
RI: Q23.2 U2.7 | length 386.3
  Top Layer w12: U2.7 835.03,1826.03 859,1850 859,2042 873,2056 947.74,2056 Q23.2
RS485_RXD1: S1.1 S1.3 U1.54 | length 2183.7
  Top Layer w8: U1.54 2057.28,1741.28 2125,1809 3017,1809 3203,1623 3203,1295 ; S1.1 3247,1039 3203,1083 3203,1295 ; S1.3 3258,1240 3203,1295
RS485_TXD1: S1.2 S1.4 U1.53 | length 1966.6
  Top Layer w8: U1.53 2076.96,1740.96 2120,1784 3003,1784 3180,1607 v2(3180,1338) ; v2(3282,1339) 3283,1340 S1.4 3395,1340 3409,1326 3409,1154 3394,1139 S1.2
  Bottom Layer w8: v2(3180,1338) 3281,1338 v2(3282,1339)
RST: C13.2 R15.2 U1.7 | length 419.9
  Top Layer w8: C13.2 R15.2 1543,1338 1559,1354 1559,1422 1587,1450 1647,1450 1681.89,1484.89 U1.7
SIM_CLK: C17.2 R39.1 U2.16 | length 379.9
  Top Layer w10: C17.2 R39.1 v2@348.98,2229.02 ; v2(501,2228) 501.29,2227.71 U2.16
  Bottom Layer w10: v2(349,2229) 350,2228 v2(501,2228)
SIM_DATA: C18.2 R25.1 U2.15 | length 228.6
  Top Layer w10: U2.15 543.98,2155.39 C18.2 R25.1
SIM_PWR: R16.2 U1.11 | length 1479.8
  Top Layer w8: v2(579,975) 849,975 1080,1206 v2(1194,1206) ; v2(1584,1218) 1593,1227 1593,1375 1624.15,1406.15 U1.11
  Bottom Layer w8: R16.2 577.87,976.13 v2(579,975) ; v2(1194,1206) 1572,1206 v2(1584,1218)
SIM_RST: C16.2 R23.1 U2.17 | length 237.1
  Top Layer w10: R23.1 C16.2 475,2314.16 475,2262 457.98,2244.98 U2.17
SIM_RXD: Q20.3 R46.1 U2.2 | length 577.7
  Top Layer w10: U2.2 944.82,1609.5 1006.14,1670.82 Q20.3
  Top Layer w20: R46.1 1159.98,1753.02 1180.4,1732.6 Q20.3
SIM_TXD: Q18.2 U2.1 | length 356.5
  Top Layer w10: U2.1 858.81,1566.19 997.55,1427.45 Q18.2
SIM_VBAT: C6.1 C9.2 C24.2 D3.2 Q22.2 R42.2 R43.2 U2.34 U2.35 | length 2637
  Top Layer w10: v2(834,1536) 999,1371 v2(1041,1371) 1085.11,1371 R42.2 ; v2(893,1637) v2(893,2006)
  Top Layer w40: D3.2 124.92,1311.19 C9.2 150.24,1313.24 223,1386 308.16,1386 C6.1
  Bottom Layer w10: C6.1 624.46,1315.19 680.27,1371 v2(1041,1371) ; v2(834,1536) 893,1595 v2(893,1637) ; v2(893,2006) 893.76,2005.24 R43.2
  Bottom Layer w40: Q22.2 63.77,1331.77 118,1386 320,1386 321,1385 339,1385 370,1354 370,1324.17 C6.1
SIM_VDD: C14.2 SIM1.1 U2.18 U4.4 | length 1016.3
  Top Layer w10: v2@307,2619 v2(307.4,2619.4) SIM1.1 ; v2(380,2423) 380,2279.2 414.68,2244.52 U2.18 ; U4.4 535.45,2539.61 C14.2 v2(536,2573)
  Bottom Layer w10: v2(307.4,2619.4) 518.6,2619.4 536,2602 v2(536,2573) 536,2456 494,2414 389,2414 v2(380,2423)
SWCLK: P3.2 U1.49 | length 1595.8
  Top Layer w10: U1.49 2759.43,1701.43 v2(2760,1702) ; v2(2760,2202) 2760,2412 2792,2444 P3.2
  Bottom Layer w10: v2(2760,1702) v2(2760,2202)
SWD: P3.4 U1.46 | length 1494.9
  Top Layer w10: U1.46 2332.38,1563.63 2369.01,1527 v2(2794,1527) ; v2(2794,2225) 2907,2225 2926,2244 P3.4
  Bottom Layer w10: v2(2794,1527) v2(2794,2225)
VCC: C25.2 C26.2 C32.2 C33.2 C34.2 C41.2 F2.2 P1.1 R14.1 R49.1 R53.2 U3.3 U5.3 | length 4229.4
  Top Layer w8: v2(178.06,1016.06) v2(178.06,1016.06) R53.2 ; 1212,981 1213,982 ; v1@1232,1016 1336,1016 1385,1065 R14.1 1451.94,906.06 1484,874 v2(1523,874)
  Top Layer w40: F2.2 499.26,596.26 520,617 828,617 912,701 912,787 1103,978 v1(1186,978)
  Bottom Layer w8: v2(178.06,1016.06) 276.94,1016.06 306,987 v1(306,774) ; R49.1 v2(1523,874)
  Bottom Layer w40: v1(1238,1027) 1236,1029 C26.2 1237,1114 C25.2
  Bottom Layer w50: v1(445,568) 2375,568 2471,472 P1.1
  other v1: 365,536 420,537 392,568 339,569 306,727 1185,1026
VCC_3.3V: C3.2 C8.2 C11.2 C12.2 C27.1 C28.1 C89.2 C90.2 D2.1 FB6.2 L2.2 P3.1 Q22.3 R15.1 R29.1 R54.2 R56.2 R57.2 R62.2 U1.13 U1.19 U1.32 U1.48 U1.64 | length 10271.9
  Top Layer w8: R62.2 1158.02,2155.06 1280.45,2277.48 v2(1833.52,2277.48) v2@1834,2277 ; v2(1427,1386) 1451.94,1361.06 R15.1 ; C8.2 1513.5,1199 1594,1199 1616,1221 1616,1353 v2(1627,1364) ; v2@1631.78,1366.78 U1.13 ; U1.64 1860.43,1653.57 1904,1610 v2(1904,1364) 1904,1344 1904,1298.2 1899.8,1294 1899.8,1278 U1.19 1899.8,1082.85 C3.2 ; v2(2022,2277) 2022,2129 2046,2105 D2.1 ; U1.48 2331,1603 ; v2(2264.06,2186.06) 2410.68,2186.06 2484.68,2186.06 ; v2(2264.94,1974.06) 2407.68,1974.06 2481.68,1974.06 2483.68,1976.06 ; v2(2339.08,1611.08) 2352,1624 2453.94,1624 C12.2
  Top Layer w12: v2@2155.7,1363.7 U1.32 2184.7,1209.3 2203,1191 2203,1166 v2(2203,1165) 2203,1085.06 C11.2
  Top Layer w20: v2(2038,1974.06) 2046,1982.06 D2.1 ; v2@2203,1166 2254,1166 2313.94,1106.06 C89.2 C90.2 2553.69,1106.06 FB6.2 2810.74,1103.74 2871,1164 v2(2936,1164)
  Top Layer w40: v3(2478,2650) 2974,2650 3028,2596 P3.1
  Bottom Layer w8: R54.2 134.06,1035.83 Q22.3 352,1062 475,1185 981,1185 ; R29.1 2093,913 2128,948 ; v2(1833.52,2277.48) 2021.52,2277.48 v2(2022,2277) ; 2266.92,1611.08 v2(2339.08,1611.08) ; R57.2 3192.94,685 R56.2
  Bottom Layer w20: 2128,948 2128,1090 v2(2203,1165) ; v2(2936,1164) 2936,820.32 2974.37,781.94 3189.89,781.94 R56.2
  Bottom Layer w40: 1032,1294 1169,1431 1378,1431 1445,1364 v2(1627,1364) v2(1904,1364) v2(2157,1364) 2204,1364 2264,1424 v2@2264,1974.06 ; v2(2038,1974.06) v2@2264,1974.06 ; v3(2478,2650) 2426,2650 2264,2488 v2@2264,1974.06
VCC_5V: C21.1 C22.1 C30.1 C31.1 L1.2 M1.6 M2.6 R50.1 | length 10439.9
  Top Layer w8: R50.1 411,1016 432,995 L1.2
  Top Layer w40: M2.6 1309,3792.9 1508.1,3992 2083,3992 2197,3878 2197,3793 ; M1.6 2110,3797.9 ; 2155.1,3797.9 2110,3797.9 ; 2222,2263 2222,2138 ; v3(2883,2046) 2314,2046 2222,2138 ; 2110,3797.9 2192.1,3797.9 2197,3793 ; 2197,3793 2197,3380 2309,3268 2309,2399 2222,2312 2222,2138
  Bottom Layer w20: 2855,2396 2861,2390 3085,2390 3101,2374 3237.87,2374
  Bottom Layer w30: 2806.31,2339.4 2849.4,2339.4 2855,2345 ; 2807.77,2516.4 2854.4,2516.4 2855,2517 ; 2810.77,2714.4 2832.6,2714.4 2855,2692 2855,2517 ; v3(2883,2046) 2883,2088 2855,2116 2855,2345 ; 2855,2345 2855,2396 2855,2517
  Bottom Layer w40: v1(723,806) 797,732 v3(2392,732) 2745,732 2882,869 2882,2045 v3(2883,2046) ; v2(780,3793) C22.1 ; C21.1 2119,3798 v2(2120,3797) ; 2751,2515.06 2752.35,2516.4 2807.77,2516.4 ; 2751.54,2339.06 2751.88,2339.4 2806.31,2339.4 ; 2752,2706.06 2760.35,2714.4 2810.77,2714.4 ; 3237.87,2374 3319,2374 3362,2331 3362,2010 3326,1974 3233.94,1974 3241.94,1982
  other v1: 589,833 553,855 722,859 654,880 584,881 766,883
VCC_IN: P6.2 Q3.2
VDD_EXT: R40.2 R41.2 R44.2 R45.2 R46.2 R47.2 R61.2 U2.40 | length 2035.1
  Top Layer w8: v2(982,1598) 1119.22,1598 R40.2
  Top Layer w12: v2(970,1668) v2(970,1719) 970,1843 994,1867 1085.22,1867 R44.2
  Top Layer w20: v2(544,1384) 544.6,1384.6 U2.40 ; v2(966,1497) 966,1582 v2(982,1598) ; v2(1009.06,2055.06) v2(1009.06,2055.06) R61.2 ; v2(1085,1905) 1085,1867.22 R44.2@1085.22,1867 ; R44.2 R46.2
  Bottom Layer w12: v2(970,1668) 982,1656 v2(982,1598)
  Bottom Layer w20: v2(544,1384) 544,1431 610,1497 v2(966,1497) ; R47.2 1008.98,1718.24 R45.2 1059.24,1720.24 1085,1746 v2(1085,1905) 1085,1989 1069.76,2004.24 R41.2 1009.06,2010.32 v2(1009.06,2055.06)
pads on no net: M1.8 M1.9 M1.10 M1.11 M1.12 M1.13 M1.14 M1.18 M2.8 M2.9 M2.10 M2.11 M2.12 M2.13 M2.14 M2.18 P5.4 SIM1.0 SIM1.6 SIM1.8 U1.2 U1.8 U1.22 U1.41 U1.44 U1.45 U1.50 U1.51 U1.62 U2.3 U2.4 U2.5 U2.9 U2.10 U2.11 U2.12 U2.14 U2.20 U2.22 U2.23 U2.24 U2.25 U2.26 U2.28 U2.29 U2.38 U2.42 U2.43 U2.44 U2.46 U2.47 U2.48 U2.49 U2.50 U2.51 U2.52 U2.53 U2.54 U2.55 U2.56 U2.57 U2.58 U2.59 U2.60 U2.63 U2.64 U2.65 U4.1 Y5.3

## Polygon pours and split planes (outlines as drawn)
AGND on Top Layer "Top Layer-No Net" (solid, remove dead copper, pour order 1000): -337,4408 -327,4418 3649,4418 3649,-498 3667,-516 -567,-516 -567,4086 -217,4436
AGND on Bottom Layer "Top Layer-No Net" (solid, remove dead copper, pour order 1001): -602,4469 -587,4484 3574,4484 3574,-279 3460,-393 3303,-236 -573,-236 -573,551 -559,565 -444,680 -444,4527

## Keep-outs
Keep-Out Layer:
  circle w2.5: c3289.93,3987.6 r1.25
  circle w2.5: c275.59,3740.16 r1.25
  circle w2.5: c-118.11,3499.67 r1.25
  circle w2.5: c0,4133.86 r1.25
  lines w5: -118.11,3479.99 -118.11,3663.26 ; -118.11,118.11 ccw(c0,118.11) 0,0 ; -118.11,118.11 ccw(c0,118.11) 0,0 ; -118.11,118.11 -118.11,4015.75 ; -118.11,118.11 -118.11,393.7 275.59,393.7 275.59,0 0,0 ; -118.11,4015.75 cw(c0,4015.75) 0,4133.86 ; -118.11,4015.75 cw(c0,4015.75) 0,4133.86 ; -118.11,4015.75 -118.11,3740.16 275.59,3740.16 275.59,4133.86 0,4133.86 ; 0,0 3307.09,0 ; 0,4133.86 3307.09,4133.86 ; 3307.09,0 ccw(c3307.09,118.11) 3425.2,118.11 ; 3307.09,0 ccw(c3307.09,118.11) 3425.2,118.11 ; 3307.09,0 3031.5,0 3031.5,393.7 3425.2,393.7 3425.2,118.11 ; 3307.09,4133.86 cw(c3307.09,4015.75) 3425.2,4015.75 ; 3307.09,4133.86 cw(c3307.09,4015.75) 3425.2,4015.75 ; 3307.09,4133.86 3031.5,4133.86 3031.5,3740.16 3425.2,3740.16 3425.2,4015.75 ; 3425.2,118.11 3425.2,4015.75

## Other copper
Top Layer:
  rectangle net VCC: 1170,959 1262,1042
  rectangle net VCC_5V: 354,788 844,900
  rectangle net VCC: 266,708 336,789
  rectangle net VCC: 257,490 319,653
  rectangle net VCC: 262,520 520,586
  rectangle net NetD1_2: 536,382 620,582
  region net SIM_VBAT: 273,1495 338,1495 343,1490 343,1407 421,1329 421,1300 406.18,1285.18 349.82,1285.18 338,1297 338,1345 262,1421 262,1484
  region net NetC35_1: 228,760 252,760 252,753 253,752 253,705 259,699 341,699 346,704 346,747 356,757 506,757 514,749 514,685 506,677 235,677 227,685 227,759
  region net NetD1_2: 555,582 736,582 736,491 563,491 546,508 546,573
  region net VCC_IN: 676,115 676,116 694,134 694,204 796,306 796,454 740,454 727,441 727,380 592,245 592,125 602,115
Bottom Layer:
  rectangle net VCC_5V: 524,787 803,899
  rectangle net VCC: 1170,959 1262,1042
  rectangle net VCC: 290,514 522,591
  rectangle net VCC: 290,517 361,792
  region net VCC_3.3V: 932,1001 1093,1001 1099,1007 1099,1054 1044,1109 1044,1329 1038,1335 1037,1334 969,1334 961,1326 961,1112 920,1071 920,1013
  region net NetC29_1: 1263,919 1267,923 1267,946 1265,948 1128,948 1109,967 931.6,967 917.6,953 917.6,899.85 928.45,889 1086,889 1116,919

## Silkscreen, mask and mechanical layers (free items; w line width, h text height)
Top Overlay:
  text "3.3V" at 2991,2615 h50
  text "SWCLK" at 2795,2430 h50
  text "GND" at 2855,2325 h50
  text "SWD" at 2855,2237 h50
  text "NBIOT" at 56,1387 h50
  text "GPS" at 494,1074 h50
  text "VBAT" at 621,319 h50
  text "GND" at 479,317 h50
Bottom Overlay:
  rectangle: 3185,1211.67 3236,1259.67
  rectangle: 3336,1211.67 3387,1259.67
  rectangle: 3185,1308 3236,1356
  rectangle: 3335,1308 3386,1356
  rectangle: 3185,1019 3236,1067
  rectangle: 3185,1115.33 3236,1163.33
  rectangle: 3332,1019 3383,1067
  rectangle: 3332,1115.33 3383,1163.33
  lines w5: 3163,1336 3131,1336 3131,1232 3166,1232 ; 3171,1142 3139,1142 3139,1038 3174,1038 ; 3223,1139 3354,1139 ; 3225,1043 3356,1043 ; 3228,1337 3359,1337 ; 3230,1240 3361,1240
  text "GND" at 3161,2864 h50
  text "GND" at 3164,2759 h50
  text "C3O" at 3155.2,2660 h50
  text "GND" at 3155.2,2560 h50
  text "C2O" at 3161,2455 h50
  text "5V" at 3151,2357 h50
  text "C1O" at 3155.2,2257 h50
  text "GND" at 3155.2,2157 h50
  text "C3OUT3" at 3148,2074 h50
  text "5V" at 3141,1963 h50
  text "C3OUT2" at 3144,1861 h50
  text "GND" at 3137,1750 h50
  text "UART" at 3105,1273 h50
  text "RS485" at 3113,1079 h50
  text "VBAT" at 2597,671 h50 r90
  text "GND" at 2890,650 h50 r90
  text "A" at 2799,643 h50 r90
  text "B" at 2685.07,638.93 h50 r90
  text "C1OUT2" at 1328,429 h50 r90
  text "C1OUT1" at 1135,420 h50 r90
  text "C2OUT2" at 1932,420 h50 r90
  text "5V" at 1024,419 h50 r90
  text "C2OUT3" at 2127,417 h50 r90
  text "C2OUT1" at 1729,415 h50 r90
  text "C3OUT1" at 2344,415 h50 r90
  text "C1OUT3" at 1528,411.99 h50 r90
  text "GND" at 1611.43,367.35 h50 r90
  text "GND" at 1240,349.67 h50 r90
  text "5V" at 1424,309 h50 r90
  text "5V" at 2226,307 h50 r90
  text "5V" at 1821,306 h50 r90
  text "TXD" at 2690,103 h50 r90
  text "GND" at 2792,103 h50 r90
  text "RXD" at 2588,98 h50 r90
Mechanical 1:
  circle w5: c78.74,3956.69 r68.9
  circle w5: c3228.35,3956.69 r68.9
  circle w5: c3228.35,177.17 r68.9
  circle w5: c78.74,177.17 r68.9
  lines w5: -118.11,393.7 -118.11,118.11 ; -118.11,3479.99 -118.11,3663.26 ; -118.11,118.11 ccw(c0,118.11) 0,0 3307.09,0 ccw(c3307.09,118.11) 3425.2,118.11 3425.2,4015.75 ccw(c3307.09,4015.75) 3307.09,4133.86 0,4133.86 ccw(c0,4015.75) -118.11,4015.75 -118.11,118.11
Mechanical 7:
  circle w2.5: c0,4133.86 r1.25
  circle w2.5: c-118.11,3499.67 r1.25
  circle w2.5: c275.59,3740.16 r1.25
  circle w2.5: c3289.93,3987.6 r1.25

## Text inside footprints (layer, text, board x,y; h text height)
C6: Top Overlay "+" at 370.98,1255.19 h30
SBatery: Top Overlay "+" at 1781,1872 h40 r270